# EAGLE board pmm (EAGLE 9.6.1)
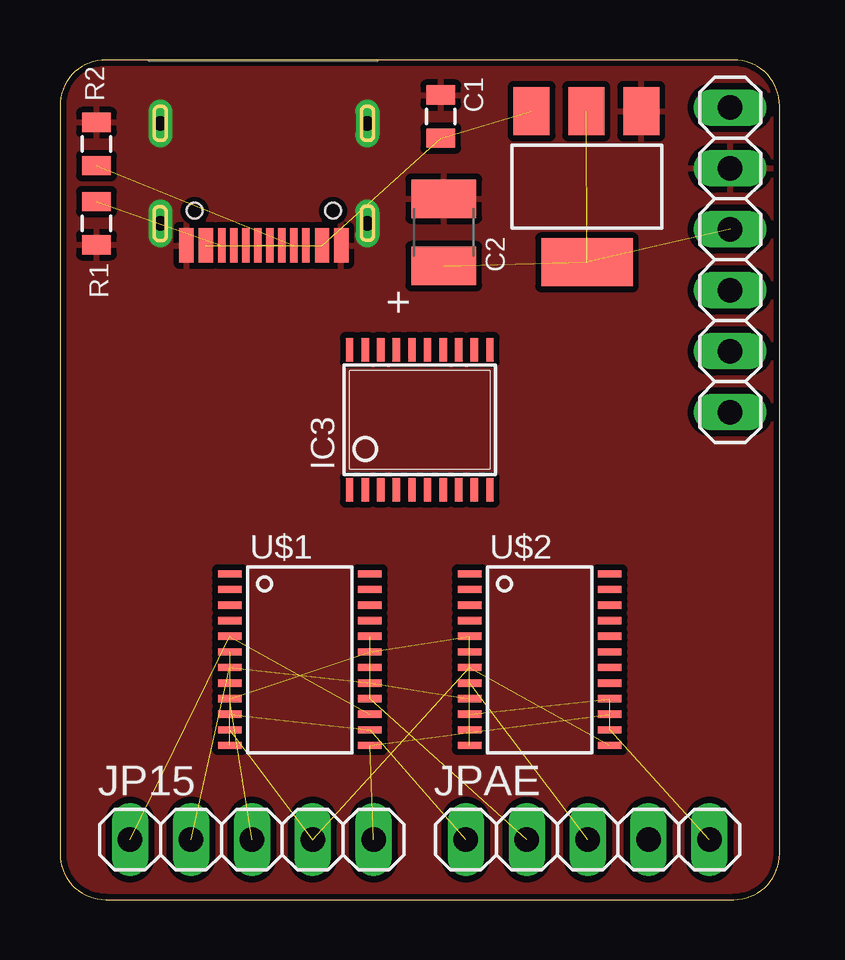
[diagram p0: board, top side]
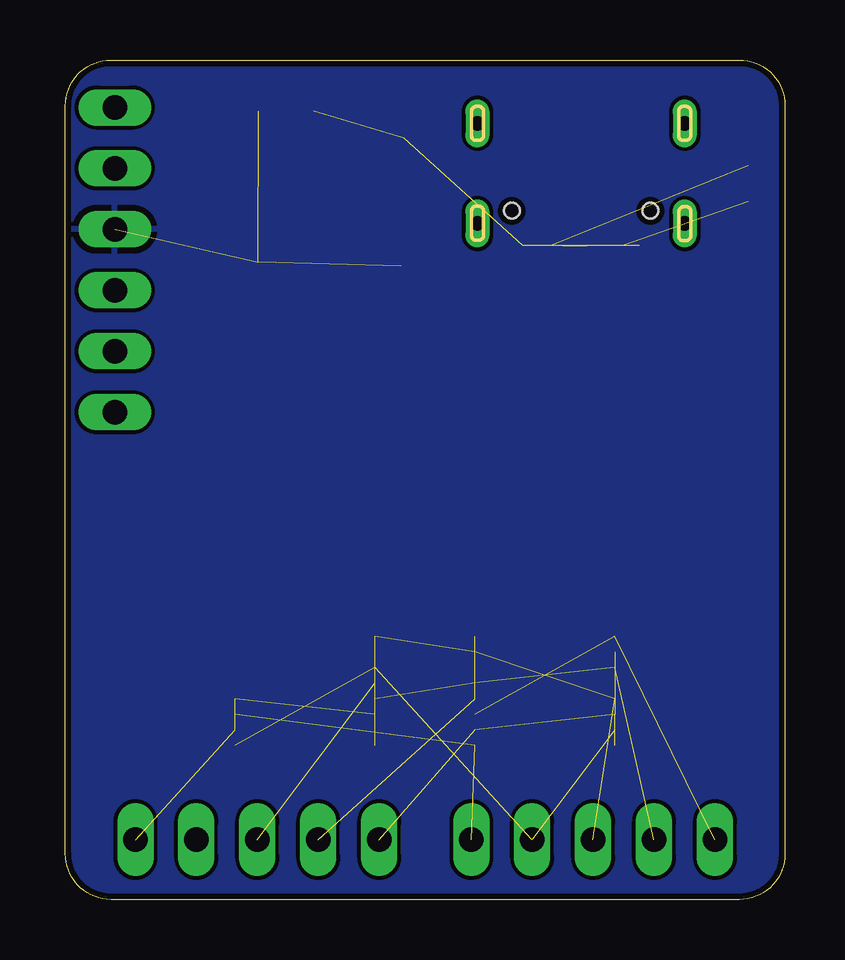
[diagram p1: board, bottom side, seen from below]

Size 30 x 35 mm. Coordinates in mm from the lower left corner, seen from the top.
Outline: 0,33.09 0,1.91 arc90 1.91,0 28.09,0 arc90 30,1.91 30,33.09 arc90 28.09,35 1.91,35 arc90 0,33.09
Copper layers (1*16): Top 0.035mm / dielectric 1.5mm / Bottom 0.035mm
Design rules "deku_2layer_6mil": minimum track width 6mil, minimum drill 15mil, track to track 6mil, track to pad 6mil, pad to pad 6mil, via to via 6mil, smd to smd 6mil, copper to edge 10mil, drill to drill 6mil, minimum pad ring 7mil, minimum via ring 7mil, stop-mask expansion 4mil, vias tented up to drill 25mil, thermal gap 10mil

## Footprints (pad centres in the part's own frame; a part is rotated, then mirrored left to right if it is on the bottom)
0805@1 = smd 0.8 x 1.2: 1 -0.9,0; 2 0.9,0
C1210 = smd 1.6 x 2.7: 1 -1.4,0; 2 1.4,0
SOT223 = smd 1.499 x 2.007: 1 -2.261,-3.15; 2 0.025,-3.15; 3 2.311,-3.15 | smd 3.81 x 2.007: 4 0,3.15
TSSOP20 = smd 0.305 x 0.991: 1 -2.925,-2.918; 2 -2.275,-2.918; 3 -1.625,-2.918; 4 -0.975,-2.918; 5 -0.325,-2.918; 6 0.325,-2.918; 7 0.975,-2.918; 8 1.625,-2.918; 9 2.275,-2.918; 10 2.925,-2.918; 11 2.925,2.918; 12 2.275,2.918; 13 1.625,2.918; 14 0.975,2.918; 15 0.325,2.918; 16 -0.325,2.918; 17 -0.975,2.918; 18 -1.625,2.918; 19 -2.275,2.918; 20 -2.925,2.918
1X06 = drill 1.016 long: 1 -6.35,0; 2 -3.81,0; 3 -1.27,0; 4 1.27,0; 5 3.81,0; 6 6.35,0
1X05 = drill 1.016 long: 1 -5.08,0; 2 -2.54,0; 3 0,0; 4 2.54,0; 5 5.08,0
0805 = smd 0.8 x 1.2: 1 -0.9,0; 2 0.9,0
USBC_16P_FOOT = smd 0.6 x 1.45: A1B12 -3.225,3.848; A4B9 -2.425,3.848; B4A9 2.425,3.848; B11A12 3.225,3.848 | smd 0.3 x 1.45: A5 -1.25,3.848; A6 -0.25,3.848; A7 0.25,3.848; A8 1.25,3.848; B5 1.75,3.848; B6 0.75,3.848; B7 -0.75,3.848; B8 -1.75,3.848 | drill 0.6 pad 1 long: P$13 -4.32,2.933; P$14 4.32,2.933; P$15 -4.32,-1.248; P$16 4.32,-1.248 | hole 0.65: -2.89,2.402; 2.89,2.402
TSSOP-24 = smd 0.305 x 0.991: 1 -3.575,-2.918; 2 -2.925,-2.918; 3 -2.275,-2.918; 4 -1.625,-2.918; 5 -0.975,-2.918; 6 -0.325,-2.918; 7 0.325,-2.918; 8 0.975,-2.918; 9 1.625,-2.918; 10 2.275,-2.918; 11 2.925,-2.918; 12 3.575,-2.918; 13 3.575,2.918; 14 2.925,2.918; 15 2.275,2.918; 16 1.625,2.918; 17 0.975,2.918; 18 0.325,2.918; 19 -0.325,2.918; 20 -0.975,2.918; 21 -1.625,2.918; 22 -2.275,2.918; 23 -2.925,2.918; 24 -3.575,2.918

## Placement (x,y rotation side)
C1  100nF  [0805@1]  15.88,32.64 270 top
C2  47uF  [C1210]  16,27.81 90 top
IC2  REG1117  [SOT223]  21.97,29.72 180 top
IC3  STM32F042F4  [TSSOP20]  15,20 0 top
JP1  [1X06]  27.94,26.67 90 top
JP15  [1X05]  8,2.5 0 top
JPAE  [1X05]  22,2.5 0 top
R1  5.1K  [0805]  1.52,28.19 270 top
R2  5.1K  [0805]  1.52,31.5 90 top
U2  USBC_16P  [USBC_16P_FOOT]  8.5,31.11 180 top
U$1  ADG714_SEPERATE  [TSSOP-24]  10,10 270 top
U$2  ADG714_SEPERATE  [TSSOP-24]  20,10 270 top

## Library data of the parts
C1 C2 = clock
IC2 = clock; MPN: REG1117; OC_FARNELL: 1097566; OC_NEWARK: 14P6981
IC3 = tx
JP1 JP15 JPAE = pinhead
R1 R2 = joyAnalog
U2 = my_usbc_16p
U$1 U$2 = pmm

## Nets
1: JP15.1 U$1.5 U$1.15
2: JP15.2 U$1.7 U$1.17 U$2.9
3: JP15.3 U$1.9 U$1.19 U$2.5 U$2.11
4: JP15.4 U$1.11 U$2.7 U$2.13
5: JP15.5 U$1.13 U$2.15
+3V3: C2.1 IC2.2 IC2.4 JP1.4
A: JPAE.1 U$1.6 U$1.8 U$1.10 U$1.12 U$1.14
B: JPAE.2 U$1.16 U$1.18 U$1.20
C: JPAE.3 U$2.6 U$2.8
DNDNDN: U2.A7 U2.B7
E: JPAE.5 U$2.10 U$2.12 U$2.14 U$2.16
GND: C1.1 C2.2 IC2.1 JP1.5 R1.2 R2.2 U2.A1B12 U2.B11A12 U2.P$13 U2.P$14 U2.P$15 U2.P$16
N$1: C1.2 IC2.3 U2.A4B9 U2.B4A9
N$31: R1.1 U2.B5
N$33: R2.1 U2.A5
USB_DP: U2.A6 U2.B6

## Tracks (layer width: path | path; a pad name or v marks a point on that pad's centre or on a via)
1  (2 unrouted)
2  (3 unrouted)
3  (4 unrouted)
4  (3 unrouted)
5  (2 unrouted)
+3V3  (3 unrouted)
  pour Bottom: 0,35.05 29.97,35.05 29.97,0 0,0
A  (5 unrouted)
B  (3 unrouted)
C  (2 unrouted)
DNDNDN  (1 unrouted)
E  (4 unrouted)
GND
  pour Top (isolate 0.254): 0,35.05 0,0 29.97,0 29.97,35.05
N$1  (3 unrouted)
N$31  (1 unrouted)
N$33  (1 unrouted)
USB_DP  (1 unrouted)